# Altium PCB EB-USB-OTG1.PcbDoc
Units mm, origin at the board's own origin, x right, y up, seen from the top; angles counter-clockwise.
Board outline 80 x 62.5 mm, 2 copper layers (Top Layer, Bottom Layer), stack 1.569 mm thick; 21 components, 95 nets, 147 pads, 21 vias.
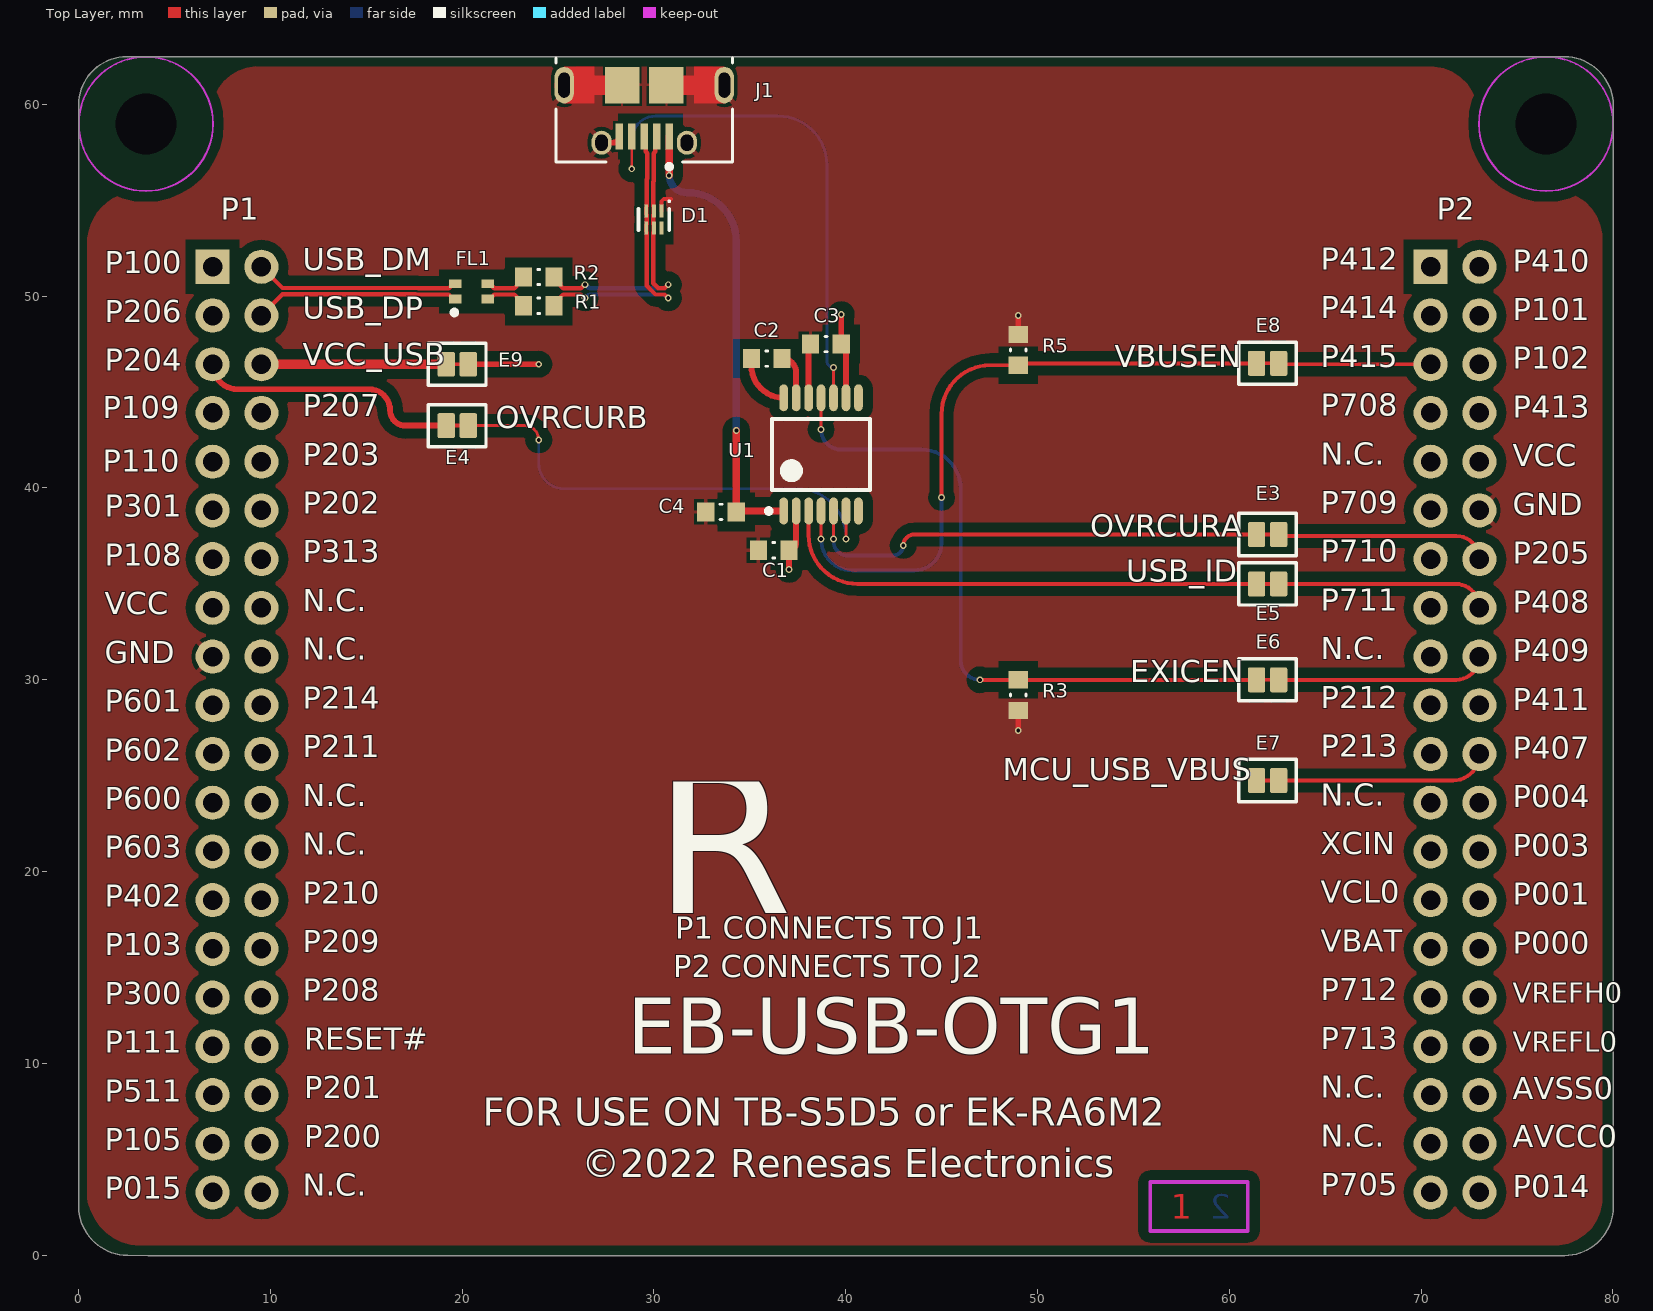
[diagram p0: Top Layer view]
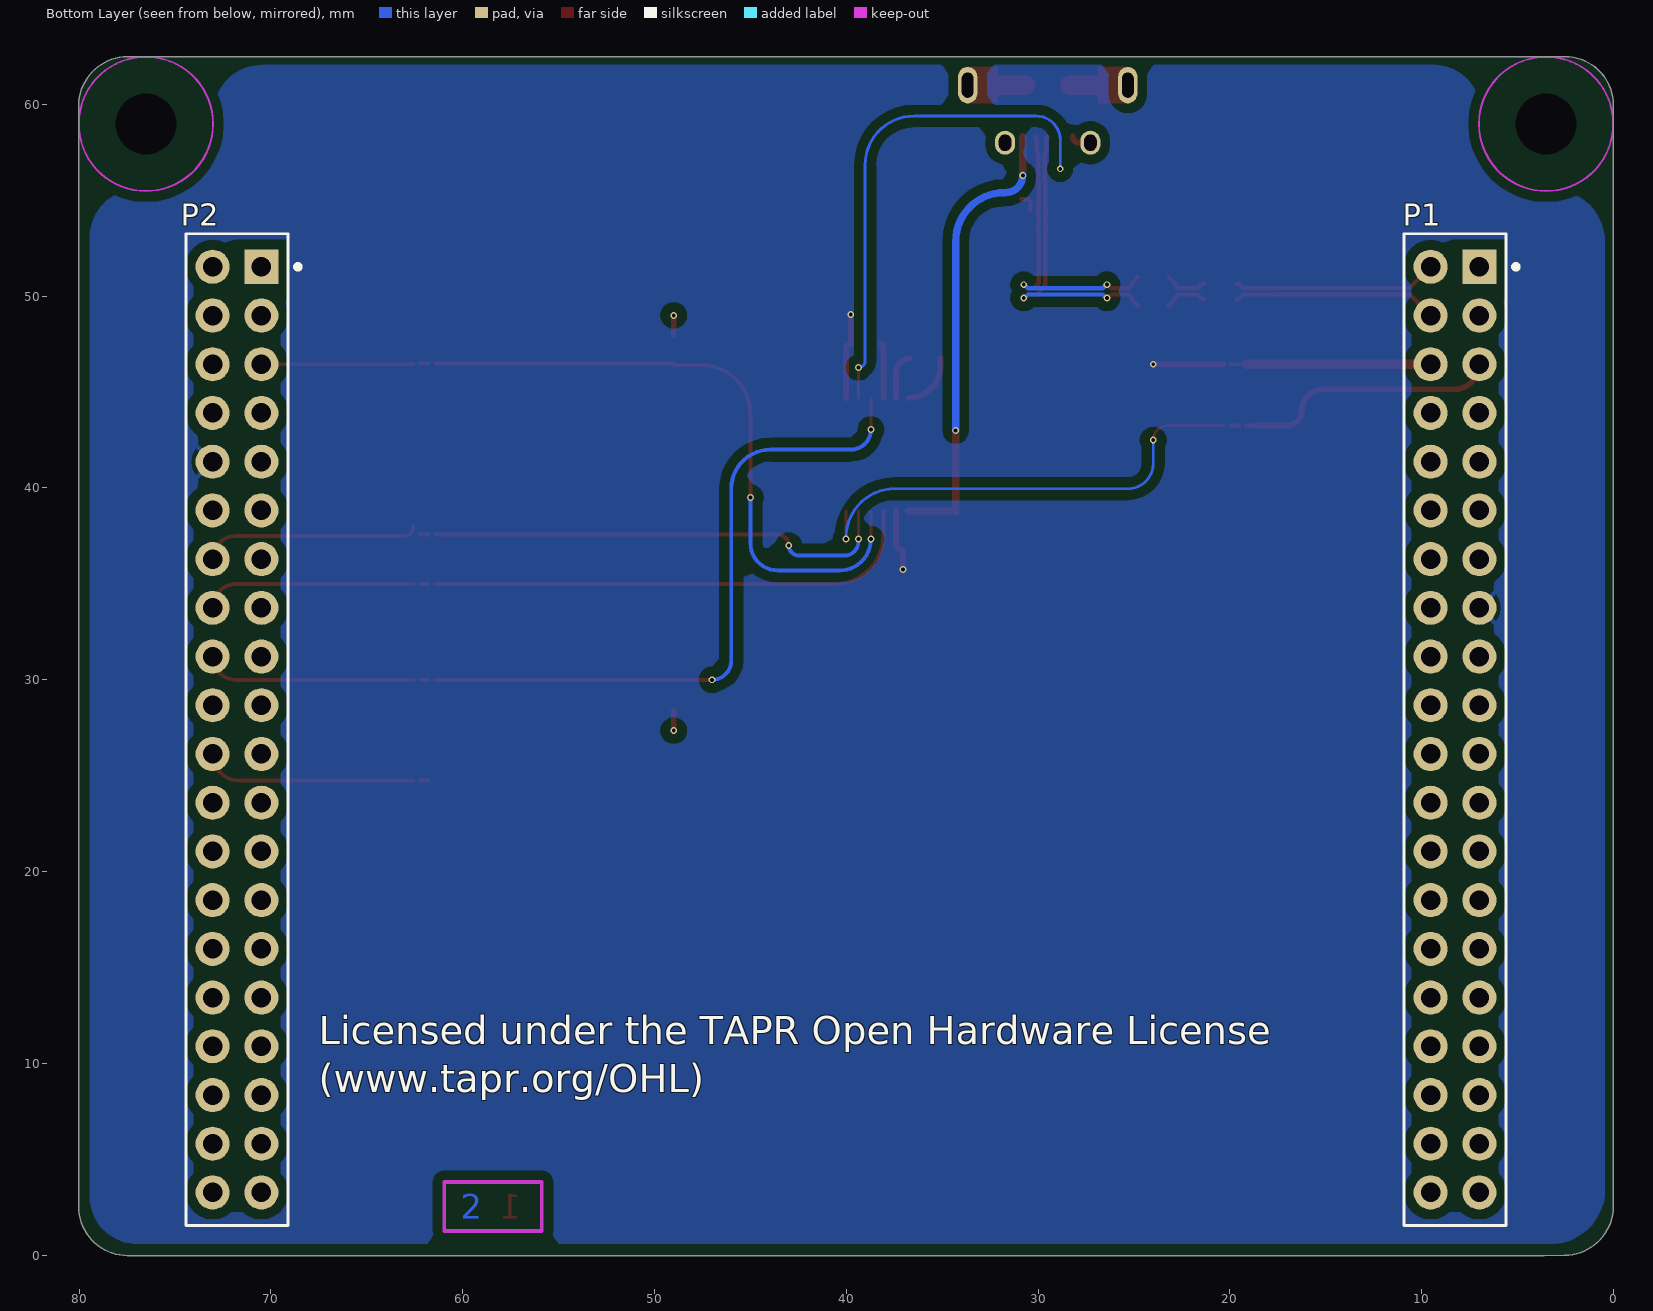
[diagram p1: Bottom Layer view, seen from below]

## Layer stack, top to bottom
Top Solder: solder mask 0.0254, SM-002, Dk 4
Top Layer: signal copper 0.035
Dielectric 1: core 1.4986, Core-043, Dk 4.3
Bottom Layer: signal copper 0.035
Bottom Solder: solder mask 0.0254, SM-002, Dk 4

## Board outline
0.018,2.54 ccw(c2.558,2.54) 2.558,0 3.612,-0.018 77.478,-0.018 ccw(c77.478,2.522) 80.018,2.522 80.018,5.982 80.018,59.942 ccw(c77.478,59.942) 77.478,62.482 2.518,62.482 ccw(c2.518,59.982) 0.018,59.982

## Design rules (kind name [scope] priority, off if disabled: settings)
AssemblyTestPointUsage [All] p1 off:
AssemblyTestpoint [All] p1 off: testpointundercomponent=TRUE minsize=1.016 maxsize=2.54 preferedsize=1.524 minholesize=0 maxholesize=1.016 preferedholesize=0.813 testpointgrid=0.025 usegrid=TRUE gridtolerance=0 allowsidetop=TRUE allowsidebottom=TRUE
Clearance Clearance_Outline [(OnLayer('PCB Outline')) vs (Not (OnLayer('Bottom Overlay') OR OnLayer('Top Overlay') OR OnLayer('Keep-Out Layer') OR OnLayer('Bottom Dimensions') OR OnLayer('Top Dimensions') OR OnLayer('External Bottom') OR OnLayer('External Top') OR OnLayer('Courtyard Bottom') OR OnLayer('Courtyard Top')))] p1: gap=0.5 ignorepadtopadclearanceinfootprint=FALSE except(0: Arc-Hole Track-Hole SMDPad-Hole THPad-Hole Via-Hole Fill-Hole Poly-Hole Region-Hole Text-Hole)
Clearance [All] p2: gap=0.15 ignorepadtopadclearanceinfootprint=TRUE except(0.102: Arc-Arc Arc-Track Track-Track; 0.508: Arc-Fill Arc-Poly Arc-Region Track-Fill Track-Poly Track-Region SMDPad-Fill SMDPad-Poly SMDPad-Region THPad-Fill THPad-Poly THPad-Region Via-Fill Via-Poly Via-Region Fill-Fill Fill-Poly Fill-Region Poly-Poly Poly-Region Region-Region)
ComponentClearance [NOT (HasFootprint('E_PadsSplit0805') OR HasFootprint('E_PadsTraceCut0805') OR HasFootprint('_SERIOUSENGINEERING') OR HasFootprint('RenesasSynergyLogo42x7') OR HasFootprint('RenesasSynergyLogo45x7')) vs NOT (HasFootprint('E_PadsSplit0805') OR HasFootprint('E_PadsTraceCut0805') OR HasFootprint('_SERIOUSENGINEERING') OR HasFootprint('RenesasSynergyLogo42x7') OR HasFootprint('RenesasSynergyLogo45x7'))] p1: gap=0 collisioncheckmode=3 verticalgap=0.254 showdistances=FALSE
DiffPairsRouting DiffPairsRouting90ohm [All] p1: maxlimit=0.102 minlimit=0.102 mostfreqgap=0.102 toplayer_minwidth=0.229 toplayer_maxwidth=0.229 toplayer_prefwidth=0.229 bottomlayer_minwidth=0.229 bottomlayer_maxwidth=0.229 bottomlayer_prefwidth=0.229 impedanceprofiledriven=TRUE impedanceprofileid={7002B5E2-4E83-42AD-950F-41F298A2E898} impedanceprofilevalue=90.000000 maxuncoupledlength=10
FabricationTestPointUsage [All] p1 off: valid=0 allowmultiple=FALSE
FabricationTestpoint [All] p1 off: side=3 testpointundercomponent=TRUE minsize=1.016 maxsize=2.54 preferedsize=1.524 minholesize=0 maxholesize=1.016 preferedholesize=0.813 testpointgrid=0.025 allowsidetop=TRUE allowsidebottom=TRUE usegrid=TRUE gridtolerance=0
HoleSize [All] p1: absolutevalues=TRUE maxlimit=10.16 minlimit=0.203 maxpercent=80.000 minpercent=20.000
MinimumSolderMaskSliver [All] p1: minsoldermaskwidth=0.095
NetAntennae [Not (IsVia)] p1: netantennaetolerance=0
PasteMaskExpansion [All] p1: expansion=-0.051
PlaneClearance [All] p1: clearance=0.2
PlaneConnect [All] p1: pad.planeconnectstyle=Relief pad.reliefexpansion=0.25 pad.reliefentries=4 pad.reliefconductorwidth=0.25 pad.reliefairgap=0.2 via.planeconnectstyle=Direct via.reliefexpansion=0.508 via.reliefentries=4 via.reliefconductorwidth=0.254 via.reliefairgap=0.254
PolygonConnect PolygonConnect_Small [(HasFootprint('CAPC0201-01') OR HasFootprint('CAPC0402-01') OR HasFootprint('FB_0402') OR HasFootprint('RESC0402-01') OR HasFootprint('E_PADSTRACECUT') OR HasFootprint('E_PADSSPLIT'))] p1: connectstyle=Relief reliefconductorwidth=0.15 reliefentries=4 polygonreliefangle="90 Angle" airgapwidth=0.15
PolygonConnect PolygonConnect_0603 [(HasFootprint('CAPC0603-01') OR HasFootprint('FB_0603'))] p2: connectstyle=Relief reliefconductorwidth=0.203 reliefentries=4 polygonreliefangle="90 Angle" airgapwidth=0.152
PolygonConnect PolygonConnect_Jmprs [(HasFootprint('E_PadsSplit0805') or HasFootprint('E_PadsTraceCut0805'))] p3: connectstyle=Relief reliefconductorwidth=0.203 reliefentries=4 polygonreliefangle="90 Angle" airgapwidth=0.25
PolygonConnect [All] p4: thpad.connectstyle=Relief thpad.reliefconductorwidth=0.25 thpad.reliefentries=4 thpad.polygonreliefangle="45 Angle" thpad.airgapwidth=0.2 smdpad.connectstyle=Direct smdpad.reliefconductorwidth=0.127 smdpad.reliefentries=4 smdpad.polygonreliefangle="90 Angle" smdpad.airgapwidth=0.127 via.connectstyle=Direct via.reliefconductorwidth=0.127 via.reliefentries=4 via.polygonreliefangle="90 Angle" via.airgapwidth=0.127
RoutingCorners [All] p1: cornerstyle=45-Degree minsetback=0.4 maxsetback=0.4
RoutingVias [All] p1: holewidth=0.203 width=0.406 viastyle="Through Hole" minholewidth=0.15 minwidth=0.3 maxholewidth=0.5 maxwidth=1
SilkToSilkClearance [All] p1: silktosilkclearance=0
SilkToSolderMaskClearance [IsPad] p1: minsilkscreentomaskgap=0.05 clearancetoexposedcopper=TRUE
SolderMaskExpansion [All] p1: expansion=0.051 istentingtop=FALSE
UnConnectedPin [All] p1:
Width Power [InNetClass('Power')] p1: maxlimit=1 minlimit=0.254 preferedwidth=0.5 minimp=50.000000 maximp=50.000000 favimp=50.000000
Width [All] p2: maxlimit=2 minlimit=0.15 preferedwidth=0.15 minimp=50.000000 maximp=50.000000 favimp=50.000000
15 further rules are at their usual default settings.

## Classes and differential pairs
differential pair USB: +USB_P -USB_N
differential pair USBPH: +USBPH_P -USBPH_N
differential pair USB_R: +USB_R_P -USB_R_N

## Components (designator, comment, footprint, x,y, rotation, side; value= is the part's Value field where it differs from the comment)
C1 "CAP-000074-01" CAPC0603-01 36.25,36.75 r180 top
C2 "CAP-000029-01" CAPC0603-01 35.886,46.75 r180 top
C3 "CAP-000029-01" CAPC0603-01 38.968,47.5 r180 top
C4 "CAP-000074-01" CAPC0603-01 33.5,38.75 r0 top
D1 "DIO-100005-01" SEMTECH_SLP1210N6 30,54 r270 top
E3 "TIE-100001-01" TraceCut0805 62,37.575 r90 top net-tie
E4 "TIE-100001-01" TraceCut0805 19.75,43.25 r270 top net-tie
E5 "TIE-100001-01" TraceCut0805 62,35 r90 top net-tie
E6 "TIE-100001-01" TraceCut0805 62,30 r90 top net-tie
E7 "TIE-100001-01" TraceCut0805 62,24.75 r90 top net-tie
E8 "TIE-100001-01" TraceCut0805 62,46.5 r90 top net-tie
E9 "TIE-100001-01" TraceCut0805 19.75,46.452 r270 top net-tie
FL1 "IND-100014-01" MURATA_FL0805 20.5,50.25 r0 top
J1 "CON-100013-01" MOLEX_47589-0001 29.5,61 r180 top value="USB uAB"
P1 "CON-100032-01" SAMTEC_SSQ-120-23-x-D 8.268,27.402 r90 bottom locked
P2 "CON-100032-01" SAMTEC_SSQ-120-23-x-D 71.768,27.402 r90 bottom locked
R1 "RES-100084-01" RESC0603-01 24,49.5 r0 top
R2 "RES-100084-01" RESC0603-01 24,51 r0 top
R3 "RES-100092-01" RESC0603-01 49,29.2 r90 top
R5 "RES-100092-01" RESC0603-01 49,47.2 r270 top
U1 "ICN-110015-01" MAXIM_TSSOP-14 38.718,41.75 r90 top

## Footprints (in the part's own frame and the unit in brackets; to place one, negate y for a bottom-side part, rotate by r counter-clockwise, add the part's x,y. Pads: shape width x height; smd on the part's side, far side on the other; paste and mask are expansions set on the pad)
CAPC0603-01 [mm] "Chip Capacitor, Body 1.6x0.8mm, Height 0.55mm, IPC Medium Density"
  rect 0.9x1 smd: 1(-0.8,0) 2(0.8,0)
  silkscreen extent -0.05,-0.4 0.05,0.4, body extent -0.87,-0.48 0.88,0.47, height 0.55
MAXIM_TSSOP-14 [mm] "TSOP, 14-Leads, Body 5.00x4.40mm, Pitch 0.65mm, IPC Medium Density"
  oval 1.4x0.45 smd: 1(-2.95,1.95) 2(-2.95,1.3) 3(-2.95,0.65) 4(-2.95,0) 5(-2.95,-0.65) 6(-2.95,-1.3) 7(-2.95,-1.95) 8(2.95,-1.95) 9(2.95,-1.3) 10(2.95,-0.65) 11(2.95,0) 12(2.95,0.65) 13(2.95,1.3) 14(2.95,1.95)
  silkscreen extent -3.07,-2.55 1.85,2.85, body extent -3.2,-2.55 3.2,2.55, height 1.1
MOLEX_47589-0001 [mm] "Molex USB Micro AB SMT with retention"
  rect 0.4x1.35 smd: 1(-1.3,2.675) 2(-0.65,2.675) 3(0,2.675) 4(0.65,2.675) 5(1.3,2.675)
  rrect100% 1x1.9 hole 1.3 slot 0.6 at 0 deg: C1(-4.175,0) C4(4.175,0)
  rect 1.8x1.9 smd: C2(-1.15,0) C3(1.15,0)
  rrect100% 1.05x1.25 hole 0.85 slot 0.65 at 0 deg: C5(-2.225,3) C6(2.225,3)
  Top Layer region: 4.175,-0.95 2.6,-0.95 2.6,0.95 4.175,0.95
  Top Layer region: -4.175,0.95 -2.6,0.95 -2.6,-0.95 -4.175,-0.95
  silkscreen extent -4.6,-1.43 4.6,4.37, body extent -4.33,-2.7 4.32,3.19, height 2.75
MURATA_FL0805 [mm] "Choke Filter, 4p, Body 1.2x2.0x1.2mm,  IPC Medium Density"
  rect 0.65x0.45 smd: 1(-0.85,-0.4) 2(0.85,-0.4) 3(0.85,0.4) 4(-0.85,0.4)
  silkscreen extent -1.02,-1.22 -0.77,-0.98, body extent -1,-0.6 1,0.6, height 1.2
RESC0603-01 [mm] "Chip Resistor, Body 1.6x0.8mm, IPC Medium Density"
  rect 0.9x1 smd: 1(-0.8,0) 2(0.8,0)
  silkscreen extent -0.05,-0.4 0.05,0.4, body extent -0.85,-0.47 0.85,0.47, height 0.6
SAMTEC_SSQ-120-23-x-D [mil] "SAMTEC Header Female 2.54mm pitch 40pos 2x20, 10.00mm pins"
  rect 70x70 hole 40: 1(950,-50)
  round 70 hole 40: 2(950,50) 3(850,-50) 4(850,50) 5(750,-50) 6(750,50) 7(650,-50) 8(650,50) 9(550,-50) 10(550,50) 11(450,-50) 12(450,50) 13(350,-50) 14(350,50) 15(250,-50) 16(250,50) 17(150,-50) 18(150,50) 19(50,-50) 20(50,50) 21(-50,-50) 22(-50,50) 23(-150,-50) 24(-150,50) 25(-250,-50) 26(-250,50) 27(-350,-50) 28(-350,50) 29(-450,-50) 30(-450,50) 31(-550,-50) 32(-550,50) 33(-650,-50) 34(-650,50) 35(-750,-50) 36(-750,50) 37(-850,-50) 38(-850,50) 39(-950,-50) 40(-950,50)
  silkscreen extent -1018,-130 1018,104, body extent -1010,-98 1010,98, height 335
SEMTECH_SLP1210N6 [mm] "Semtech, 6 pin SON, SLP1210N6"
  rect 0.675x0.2 smd: 1(-0.437,0.4) 2(-0.437,0) 3(-0.437,-0.4) 4(0.437,-0.4) 5(0.437,0) 6(0.437,0.4)
  silkscreen extent -1,-0.8 0.55,0.85, body extent -0.55,-0.65 0.55,0.65, height 0.65
TraceCut0805 [mm] "0805-size Pads only on PCB with an 8mil wide cuttable trace to allow separation"
  rrect20% 1.3x0.9 smd paste-0.6 mask+0.25: 1(0,0.575) 2(0,-0.575)
  Top Layer region: -0.1,-0.3 0.1,-0.3 0.1,0.3 -0.1,0.3
  Top Layer pour cut-out: -1,1.4 1,1.4 1,-1.4 -1,-1.4
  silkscreen extent -1.1,-1.5 1.1,1.5

## Part data
C1 C4: "Ceramic Chip Capacitor 0603 1uF 50V", Capacitance=1uF, Manufacturer="Taiyo Yuden", Manufacturer Part Number 1=UMK107BJ105KA-T, Package=0603, Supplier Part Number 1=1276-1860-1-ND, Tolerance=10%, Voltage=50V, Dialectric=X5R, Manufacturer 1="Taiyo Yuden", Mfg="Taiyo Yuden", Mfg Part Number=UMK107BJ105KA-T, Old Mfg=Samsung, Old PN=CL10A105KB8NNNC, PN=UMK107BJ105KA-T, Supplier 1=Digi-Key, Supplier 2=Digi-Key, Supplier 3=Mouser, Supplier 4=Farnell, Supplier Part Number 2=587-2400-1-ND, Supplier Part Number 3=963-UMK107BJ105KA-T, Supplier Part Number 4=2112858
C2 C3: "Ceramic Chip Capacitor 0603 0.1uF 50V", Capacitance=0.1uF, Manufacturer=Samsung, Manufacturer Part Number 1=CL10B104KB8NNNC, Package=0603, Supplier Part Number 1=1276-1000-1-ND, Tolerance=10%, Voltage=50V, Dialectric=X7R, Manufacturer 1=Samsung, Mfg=Samsung, Mfg Part Number=CL10B104KB8NNNC, PN=CL10B104KB8NNNC, Supplier 1=Digi-Key, Supplier 2=RSComponents, Supplier 3=Mouser, Supplier Part Number 2=7665443, Supplier Part Number 3=187-CL10B104KB8NNNC
D1: "Semtech TVS Diode Array for USB", Manufacturer=Semtech, Manufacturer Part Number 1=RClamp0582N.TCT, Package=SLP1210N6, Supplier Part Number 1=RCLAMP0582N.TCTCT-ND, Display Name=RClamp0582N, Manufacturer 1=Semtech, Mfg=Semtech, Mfg Part Number=RClamp0582N.TCT, PN=RClamp0582N.TCT, Supplier 1=Digi-Key
E3 E4 E5 E6 E7 E8 E9: "Trace-Cut Jumper.  Pads on PCB with Trace Between for Cutting to isolate", DISPLAY_NAME="Trace-cut Jumper"
FL1: "Common Mode Filter Inductor, 180 ohm CM @ 100MHz, 0805", Current=330mA, Manufacturer=Murata, Manufacturer Part Number 1=DLW21SN181SQ2, Package=FL0805, Resistance="180 @ 100MHZ", Supplier Part Number 1=490-5139-1-ND, Tolerance=25%, Manufacturer 1=Murata, Mfg=Murata, Mfg Part Number=DLW21SN181SQ2, PN=DLW21SN181SQ2, Supplier 1=Digi-Key, Supplier 2=RSComponents, Supplier 3=Mouser, Supplier Part Number 2=8119745, Supplier Part Number 3=81-DLW21SN181SQ2L
J1: "USB Micro AB 2.0 Female 5 Pin Right Angle Molex", Manufacturer=Molex, Manufacturer Part Number 1=47589-0001, Supplier Part Number 1=WM17143CT-ND, Manufacturer 1=Molex, Mfg=Molex, Mfg Part Number=47589-0001, PN=47589-0001, Supplier 1=Digi-Key
P1 P2: "SAMTEC Female Header 0.1\" pitch 40pos 2x20, 10mm pins, gold flash tail", Manufacturer=Samtec, Manufacturer Part Number 1=SSQ-120-23-G-D, Supplier Part Number 1=SAM11925-ND, Manufacturer 1=Samtec, Mfg=Samtec, Mfg Part Number=SSQ-120-23-G-D, Pitch=2.54mm, PN=SSQ-120-23-G-D, Positions=40, Supplier 1=Digi-Key, Supplier 2=Mouser, Supplier Part Number 2=200-SSQ12023GD, system=connector
R1 R2: "Chip Resistor Thick Film 0603 27R0 1% 1/10W", Manufacturer=Yageo, Manufacturer Part Number 1=RC0603FR-0727RL, Package=0603, Power=1/10W, Resistance=27, Supplier Part Number 1=311-27.0HRCT-ND, Tolerance=1%, Manufacturer 1=Yageo, Mfg=Yageo, Mfg Part Number=RC0603FR-0727RL, PN=RC0603FR-0727RL, Supplier 1=Digi-Key, Supplier 2=Mouser, Supplier Part Number 2=603-RC0603FR-0727RL
R3 R5: "Chip Resistor Thick Film 0603 220 ohm 1% 1/10W", Manufacturer=Yageo, Manufacturer Part Number 1=RC0603FR-07220RL, Package=0603, Power=1/10W, Resistance=220R, Supplier Part Number 1=311-220HRCT-ND, Tolerance=1%, Manufacturer 1=Yageo, Mfg=Yageo, Mfg Part Number=RC0603FR-07220RL, PN=RC0603FR-07220RL, Supplier 1=Digi-Key, Supplier 2=Mouser, Supplier Part Number 2=603-RC0603FR-07220RL
U1: "USB OTG Charge Pump", Manufacturer=Maxim, Manufacturer Part Number 1=MAX3355EEUD, Supplier Part Number 1=MAX3355EEUD+-ND, Display Name=MAX3355, Manufacturer 1=Maxim, Mfg=Maxim, Mfg Part Number=MAX3355EEUD, PN=MAX3355EEUD, Supplier 1=Digi-Key, Supplier 2=Mouser, Supplier 3=Farnell, Supplier Part Number 2=700-MAX3355EEUD, Supplier Part Number 3=2514394

## Free pads (board coordinates)
  round 3 hole 3.175 unplated paste-2539.97 mask-1.5: MH1(3.518,58.982) MH2(76.518,58.982)

## Via types
v1: diameter 0.356, hole 0.203, Top Layer to Bottom Layer, tented both sides, 21 vias

## Nets (pads, with @x,y where several pads share a name; then routed paths per layer and width w, separated by ;. In a path a pad name is that pad's centre, name@x,y a point inside that pad or via, vN(x,y) a via of type N, cw(c..) or ccw(c..) an arc to the next point about the centre after c; other vN are vias at no path point)
+3V3: C1.1 C3.1 E9.1 P1.15 P2.10 U1.2 U1.9 | length 11.4
  Top Layer w0.305: E9.1 v1(24,46.452) ; v1(37.05,35.75) C1.1 ccw(c37.05,37.118) 37.418,37.118 U1.2 ; v1(39.768,49.047) C3.1 cw(c39.768,47.25) 40.018,47.25 U1.9
GND: C1.2 C3.2 C4.1 D1.1 J1.5 J1.C1 J1.C2 J1.C3 J1.C4 J1.C5 J1.C6 P1.17 P2.12 R3.1 R5.1 U1.12 | length 13.1
  Top Layer w0.203: D1.1 30.4,54.948 30.519,55.067 30.886,55.067
  Top Layer w0.305: J1.C6 27.875,58 ccw(c27.875,58.325) J1.5 ; U1.12 38.068,47.4 cw(c38.168,47.4) C3.2 ; v1(49,27.35) R3.1 ; R5.1 v1(49,49)
  Top Layer w1.016: J1.C4 J1.C3 ; J1.C2 J1.C1
ID_IN: J1.4 U1.10 | length 27.9
  Top Layer w0.15: v1(28.85,56.64) J1.4 ; U1.10 v1(39.368,46.275)
  Bottom Layer w0.15: v1(28.85,56.64) 28.85,58.147 cw(c30.093,58.147) 30.093,59.39 36.478,59.39 cw(c36.478,56.85) 39.018,56.85 39.018,46.625 ccw(c39.368,46.625) v1(39.368,46.275)
ID_OUT: E5.1 U1.3 | length 26.1
  Top Layer w0.203: U1.3 38.068,37.54 ccw(c40.608,37.54) 40.106,35.05 ccw(c40.608,37.54) 40.608,35 49,35 E5.1
MCU_USB_EXICEN: E6.2 P2.18 | length 11.2
  Top Layer w0.203: E6.2 71.826,30 ccw(c71.826,31.212) P2.18
MCU_USB_ID: E5.2 P2.16 | length 11.2
  Top Layer w0.203: E5.2 71.79,35 cw(c71.79,33.752) P2.16
MCU_USB_OVRCURA: E3.2 P2.14 | length 11.4
  Top Layer w0.203: E3.2@62.575,38 ccw(c63.075,38) 63.075,37.5 71.83,37.5 cw(c71.83,36.292) P2.14
MCU_USB_OVRCURB: E4.2 P1.5 | length 14
  Top Layer w0.203: 18.702,43.25 E4.2
  Top Layer w0.305: P1.5 ccw(c8.3,46.452) 8.3,45.15 15.15,45.15 cw(c15.15,44.05) 16.25,44.05 ccw(c17.05,44.05) 17.05,43.25 18.702,43.25
MCU_USB_VBUS: E7.2 P2.22 | length 11.3
  Top Layer w0.203: E7.2 71.656,24.75 ccw(c71.656,26.132) P2.22
MCU_USB_VBUSEN: E8.2 P2.5 | length 8
  Top Layer w0.203: E8.2 ccw(c62.623,46.5) 62.623,46.452 P2.5
MCU_VCC_USB: E9.2 P1.6 | length 9.6
  Top Layer w0.508: P1.6 16.799,46.452 E9.2
NetC2_1: C2.1 U1.13 | length 2.5
  Top Layer w0.305: C2.1 cw(c36.686,46.018) 37.418,46.018 U1.13
NetC2_2: C2.2 U1.14 | length 3
  Top Layer w0.305: C2.2 35.086,46.382 ccw(c36.768,46.382) U1.14
NetD1_6: D1.6
NetE7_1: E7.1
NetP1_1: P1.1
NetP1_3: P1.3
NetP1_7: P1.7
NetP1_8: P1.8
NetP1_9: P1.9
NetP1_10: P1.10
NetP1_11: P1.11
NetP1_12: P1.12
NetP1_13: P1.13
NetP1_14: P1.14
NetP1_16: P1.16
NetP1_18: P1.18
NetP1_19: P1.19
NetP1_20: P1.20
NetP1_21: P1.21
NetP1_22: P1.22
NetP1_23: P1.23
NetP1_24: P1.24
NetP1_25: P1.25
NetP1_26: P1.26
NetP1_27: P1.27
NetP1_28: P1.28
NetP1_29: P1.29
NetP1_30: P1.30
NetP1_31: P1.31
NetP1_32: P1.32
NetP1_33: P1.33
NetP1_34: P1.34
NetP1_35: P1.35
NetP1_36: P1.36
NetP1_37: P1.37
NetP1_38: P1.38
NetP1_39: P1.39
NetP1_40: P1.40
NetP2_1: P2.1
NetP2_2: P2.2
NetP2_3: P2.3
NetP2_4: P2.4
NetP2_6: P2.6
NetP2_7: P2.7
NetP2_8: P2.8
NetP2_9: P2.9
NetP2_11: P2.11
NetP2_13: P2.13
NetP2_15: P2.15
NetP2_17: P2.17
NetP2_19: P2.19
NetP2_20: P2.20
NetP2_21: P2.21
NetP2_23: P2.23
NetP2_24: P2.24
NetP2_25: P2.25
NetP2_26: P2.26
NetP2_27: P2.27
NetP2_28: P2.28
NetP2_29: P2.29
NetP2_30: P2.30
NetP2_31: P2.31
NetP2_32: P2.32
NetP2_33: P2.33
NetP2_34: P2.34
NetP2_35: P2.35
NetP2_36: P2.36
NetP2_37: P2.37
NetP2_38: P2.38
NetP2_39: P2.39
NetP2_40: P2.40
NetU1_7: U1.7
NetU1_8: U1.8
OFFVBUS#: E8.1 R5.2 U1.4 | length 34.2
  Top Layer w0.15: v1(38.718,37.335) U1.4
  Top Layer w0.203: v1(45,39.5) 45,43.86 cw(c47.54,43.86) 47.54,46.4 R5.2 cw(c49.1,46.4) 49.1,46.5 E8.1
  Bottom Layer w0.203: v1(38.718,37.335) ccw(c40.353,37.335) 39.405,36.003 ccw(c40.353,37.335) 40.353,35.7 43.575,35.7 ccw(c43.575,37.125) 45,37.125 v1(45,39.5)
SHDN#: E6.1 R3.2 U1.11 | length 35.7
  Top Layer w0.15: v1(38.718,43.05) U1.11
  Top Layer w0.203: v1(47,30) R3.2 E6.1
  Bottom Layer w0.203: v1(38.718,43.05) ccw(c39.768,43.05) 39.768,42 43.96,42 cw(c43.96,39.96) 46,39.96 46,31 ccw(c47,31) v1(47,30)
STATUS1: E3.1 U1.5 | length 24.7
  Top Layer w0.15: v1(39.368,37.335) U1.5
  Top Layer w0.203: v1(43,37) cw(c43.575,37) 43.575,37.575 E3.1
  Bottom Layer w0.203: v1(39.368,37.335) 39.368,37.214 ccw(c40.106,37.214) 39.406,36.98 ccw(c40.106,37.214) 40.106,36.475 42.475,36.475 ccw(c42.475,37) v1(43,37)
STATUS2: E4.1 U1.6 | length 25.1
  Top Layer w0.15: E4.1 23.25,43.25 cw(c23.25,42.5) v1(24,42.5) ; v1(40.018,37.335) U1.6
  Bottom Layer w0.15: v1(24,42.5) 24,41.285 ccw(c25.325,41.285) 25.325,39.96 37.478,39.96 cw(c37.478,37.42) 40.018,37.42 v1(40.018,37.335)
USB_N: D1.2 D1.5 J1.2 R2.2 | length 15.3
  Top Layer w0.229: R2.2 25.136,50.664 25.136,50.549 25.27,50.415 25.593,50.415 26.197,50.415 26.382,50.6 v1(26.416,50.6) ; J1.2 30.064,58.239 30.064,57.529 29.99,57.455 29.99,55.987 29.965,55.962 29.965,54.681 30,54.646 D1.2 30,54.257 29.986,54.243 29.965,54.243 29.965,53.757 29.986,53.757 30,53.743 D1.5 30,53.354 29.965,53.319 29.965,50.679 30.229,50.415 30.553,50.415 30.737,50.6 v1(30.75,50.6)
  Bottom Layer w0.229: v1(26.416,50.6) 26.45,50.6 26.635,50.415 30.531,50.415 30.716,50.6 v1(30.75,50.6)
USB_P: D1.3 D1.4 J1.3 R1.2 | length 15.8
  Top Layer w0.229: R1.2 25.136,49.836 25.136,49.951 25.27,50.085 25.73,50.085 26.197,50.085 26.382,49.9 v1(26.416,49.9) ; J1.3 29.586,58.239 29.586,57.529 29.66,57.455 29.66,56.124 29.635,56.099 29.635,54.681 29.6,54.646 D1.3 29.6,54.257 29.614,54.243 29.635,54.243 29.635,53.757 29.614,53.757 29.6,53.743 D1.4 29.6,53.354 29.635,53.319 29.635,50.543 30.093,50.085 30.553,50.085 30.737,49.9 v1(30.75,49.9)
  Bottom Layer w0.229: v1(26.416,49.9) 26.45,49.9 26.635,50.085 30.531,50.085 30.716,49.9 v1(30.75,49.9)
USB_R_N: FL1.3 R2.1 | length 2.3
  Top Layer w0.229: FL1.3 21.45,50.65 21.685,50.415 22.73,50.415 22.864,50.549 22.864,50.664 R2.1
USB_R_P: FL1.2 R1.1 | length 2.3
  Top Layer w0.229: FL1.2 21.45,49.85 21.685,50.085 22.73,50.085 22.864,49.951 22.864,49.836 R1.1
USBPH_N: FL1.4 P1.2 | length 10.7
  Top Layer w0.229: P1.2 10.643,50.427 17.714,50.427 17.727,50.415 19.315,50.415 19.55,50.65 FL1.4
USBPH_P: FL1.1 P1.4 | length 10.7
  Top Layer w0.229: P1.4 10.643,50.097 17.578,50.097 17.59,50.085 19.315,50.085 19.55,49.85 FL1.1
VBUS: C4.2 J1.1 U1.1 | length 24.1
  Top Layer w0.381: v1(30.8,56.3) 30.8,57.794 ccw(c30.292,57.793) 30.799,57.829 cw(c31.725,57.9) 30.796,57.9 30.796,58.1 cw(c31.725,58.1) 30.799,58.171 ccw(c30.292,58.207) 30.8,58.206 J1.1 ; v1(34.3,43) C4.2 34.35,38.8 U1.1
  Bottom Layer w0.381: v1(30.8,56.3) ccw(c31.7,56.3) 31.7,55.4 31.76,55.4 cw(c31.76,52.86) 34.3,52.86 v1(34.3,43)

## Polygon pours and split planes (outlines as drawn)
+3V3 on Bottom Layer "+3V3_L02_P006" (solid, remove dead copper, pour order 6): 0.463,3.087 ccw(c3.364,3.495) 2.956,0.594 76.951,0.594 ccw(c76.951,3.087) 79.445,3.087 79.445,53.053 ccw(c76.948,53.068) 76.963,55.565 cw(c76.501,59.103) 72.963,58.642 72.963,59.565 ccw(c70.458,59.55) 70.443,62.055 9.493,62.055 ccw(c9.367,59.65) 6.963,59.775 6.963,59.065 cw(c3.463,59.064) 3.463,55.565 3.003,55.565 ccw(c3.232,52.795) 0.463,52.565
GND on Top Layer "GND_L01_P005" (solid, remove dead copper, pour order 5): 0.463,3.004 ccw(c3.364,3.412) 2.956,0.511 76.951,0.511 ccw(c76.951,3.004) 79.445,3.004 79.445,52.97 ccw(c76.948,52.985) 76.963,55.482 cw(c76.501,59.021) 72.963,58.559 72.963,59.482 ccw(c70.458,59.467) 70.443,61.972 9.493,61.972 ccw(c9.367,59.568) 6.963,59.692 6.963,58.982 cw(c3.463,58.982) 3.463,55.482 3.003,55.482 ccw(c3.232,52.713) 0.463,52.482

## Keep-outs
Top Layer:
  lines w0.2: 55.88,1.27 55.88,3.81 60.96,3.81 60.96,1.27 55.88,1.27
Bottom Layer:
  lines w0.2: 55.88,1.27 60.96,1.27 60.96,3.81 55.88,3.81 55.88,1.27
Keep-Out Layer:
  circle w0.1: c76.518,58.982 r3.5
  circle w0.1: c3.518,58.982 r3.5

## Other copper
Top Layer:
  text "1" at 56.938,1.905 h1.27
  text "Top L1" at 5.254,-4.254 h1.5
Bottom Layer:
  text "2" at 60.113,1.905 h1.27
  text "Bottom L2" at 40.254,-4.254 h1.5

## Silkscreen, mask and mechanical layers (free items; w line width, h text height)
Top Overlay:
  text "P1" at 7.417,53.6 h2
  text "P2" at 70.817,53.6 h2
  text "P412" at 64.77,50.993 h2
  text "USB_DM" at 11.684,50.965 h2
  text "P410" at 74.776,50.893 h2
  text "P100" at 1.37,50.801 h2
  text "P414" at 64.77,48.453 h2
  text "USB_DP" at 11.684,48.425 h2
  text "P101" at 74.776,48.353 h2
  text "P206" at 1.37,48.261 h2
  text "VCC_USB" at 11.684,46.014 h2
  text "VBUSEN" at 54.028,45.908 h2
  text "P415" at 64.77,45.913 h2
  text "P102" at 74.776,45.813 h2
  text "P204" at 1.37,45.721 h2
  text "P708" at 64.77,43.373 h2
  text "P207" at 11.684,43.345 h2
  text "P413" at 74.776,43.273 h2
  text "P109" at 1.27,43.25 h2
  text "OVRCURB" at 21.751,42.733 h2
  text "N.C." at 64.77,40.833 h2
  text "P203" at 11.684,40.805 h2
  text "VCC" at 74.776,40.733 h2
  text "P110" at 1.27,40.459 h2
  text "P709" at 64.77,38.293 h2
  text "P202" at 11.684,38.265 h2
  text "GND" at 74.776,38.193 h2
  text "P301" at 1.37,38.101 h2
  text "OVRCURA" at 52.743,37.058 h2
  text "P710" at 64.77,35.753 h2
  text "P313" at 11.684,35.725 h2
  text "P205" at 74.776,35.653 h2
  text "P108" at 1.37,35.561 h2
  text "USB_ID" at 54.631,34.712 h2
  text "P711" at 64.77,33.213 h2
  text "N.C." at 11.684,33.185 h2
  text "P408" at 74.776,33.113 h2
  text "VCC" at 1.37,33.021 h2
  text "N.C." at 64.77,30.673 h2
  text "N.C." at 11.684,30.645 h2
  text "P409" at 74.776,30.573 h2
  text "GND" at 1.37,30.481 h2
  text "EXICEN" at 54.844,29.483 h2
  text "P212" at 64.77,28.133 h2
  text "P214" at 11.684,28.105 h2
  text "P411" at 74.776,28.033 h2
  text "P601" at 1.37,27.941 h2
  text "P213" at 64.77,25.593 h2
  text "P211" at 11.684,25.565 h2
  text "P407" at 74.776,25.493 h2
  text "P602" at 1.37,25.401 h2
  text "MCU_USB_VBUS" at 48.181,24.369 h2
  text "N.C." at 64.77,23.053 h2
  text "N.C." at 11.684,23.025 h2
  text "P004" at 74.776,22.953 h2
  text "P600" at 1.37,22.861 h2
  text "XCIN" at 64.769,20.513 h2
  text "N.C." at 11.684,20.485 h2
  text "P003" at 74.776,20.413 h2
  text "P603" at 1.37,20.321 h2
  text "VCL0" at 64.77,17.973 h2
  text "P210" at 11.684,17.945 h2
  text "P001" at 74.776,17.873 h2
  text "P402" at 1.37,17.781 h2
  text "P1 CONNECTS TO J1" at 31.121,16.099 h2
  text "VBAT" at 64.77,15.433 h2
  text "P209" at 11.684,15.405 h2
  text "P000" at 74.776,15.333 h2
  text "P103" at 1.37,15.241 h2
  text "P2 CONNECTS TO J2" at 31.02,14.099 h2
  text "R" at 30,14.06 h20
  text "P712" at 64.77,12.893 h2
  text "P208" at 11.684,12.865 h2
  text "VREFH0" at 74.776,12.793 h1.8
  text "P300" at 1.37,12.701 h2
  text "P713" at 64.77,10.353 h2
  text "RESET#" at 11.784,10.314 h2
  text "VREFL0" at 74.776,10.253 h1.8
  text "P111" at 1.37,10.161 h2
  text "EB-USB-OTG1" at 28.637,9.545 h5
  text "N.C." at 64.77,7.813 h2
  text "P201" at 11.784,7.785 h2
  text "AVSS0" at 74.775,7.742 h2
  text "P511" at 1.37,7.621 h2
  text "FOR USE ON TB-S5D5 or EK-RA6M2" at 21.076,6.268 h2.5
  text "N.C." at 64.77,5.273 h2
  text "P200" at 11.784,5.245 h2
  text "AVCC0" at 74.775,5.242 h2
  text "P105" at 1.37,5.081 h2
  text "©2022 Renesas Electronics" at 26.228,3.558 h2.5
  text "P705" at 64.77,2.733 h2
  text "N.C." at 11.684,2.705 h2
  text "P014" at 74.776,2.633 h2
  text "P015" at 1.37,2.541 h2
  text "Top Silkscreen" at 5.254,-11.754 h1.5
Bottom Overlay:
  text "Licensed under the TAPR Open Hardware License  / (www.tapr.org/OHL)" at 67.5,8 h2.5
  text "Bottom Silkscreen" at 40.254,-11.754 h1.5
Top Paste:
  text "Top Solder Paste" at 5.254,-9.254 h1.5
Bottom Paste:
  text "Bottom Solderpaste" at 40.254,-9.254 h1.5
Top Solder:
  text "Top Soldermask" at 5.254,-6.754 h1.5
Bottom Solder:
  text "Bottom Soldermask" at 40.254,-6.754 h1.5
PCB Outline:
  lines w0.127: 0,2.558 ccw(c2.558,2.558) 2.558,0 77.442,0 ccw(c77.442,2.558) 80,2.558 80,59.942 ccw(c77.442,59.942) 77.442,62.5 2.722,62.5 ccw(c2.722,59.778) 0,59.778 0,3 0,2.558
  text "PCB Outline" at 5,-2.108 h1.5
Body Top:
  text "Top Component Body" at 5.254,-16.746 h1.5
Body Bottom:
  text "Bottom Component Body" at 40.254,-16.754 h1.5
Courtyard Top:
  text "Top Courtyard" at 5.254,-14.254 h1.5
Courtyard Bottom:
  text "Bottom Courtyard" at 40.254,-14.254 h1.5